# Altium PCB CapElectrodes_v2.0.PcbDoc
Units mm, origin at the board's own origin, x right, y up, seen from the top; angles counter-clockwise.
Board outline 44 x 44 mm, 4 copper layers (Top Layer 1, GND, PWR, Bottom Layer 1), stack 0.603 mm thick; 50 components, 31 nets, 132 pads, 53 vias.
Unrouted connection lines stored in the file: 8.
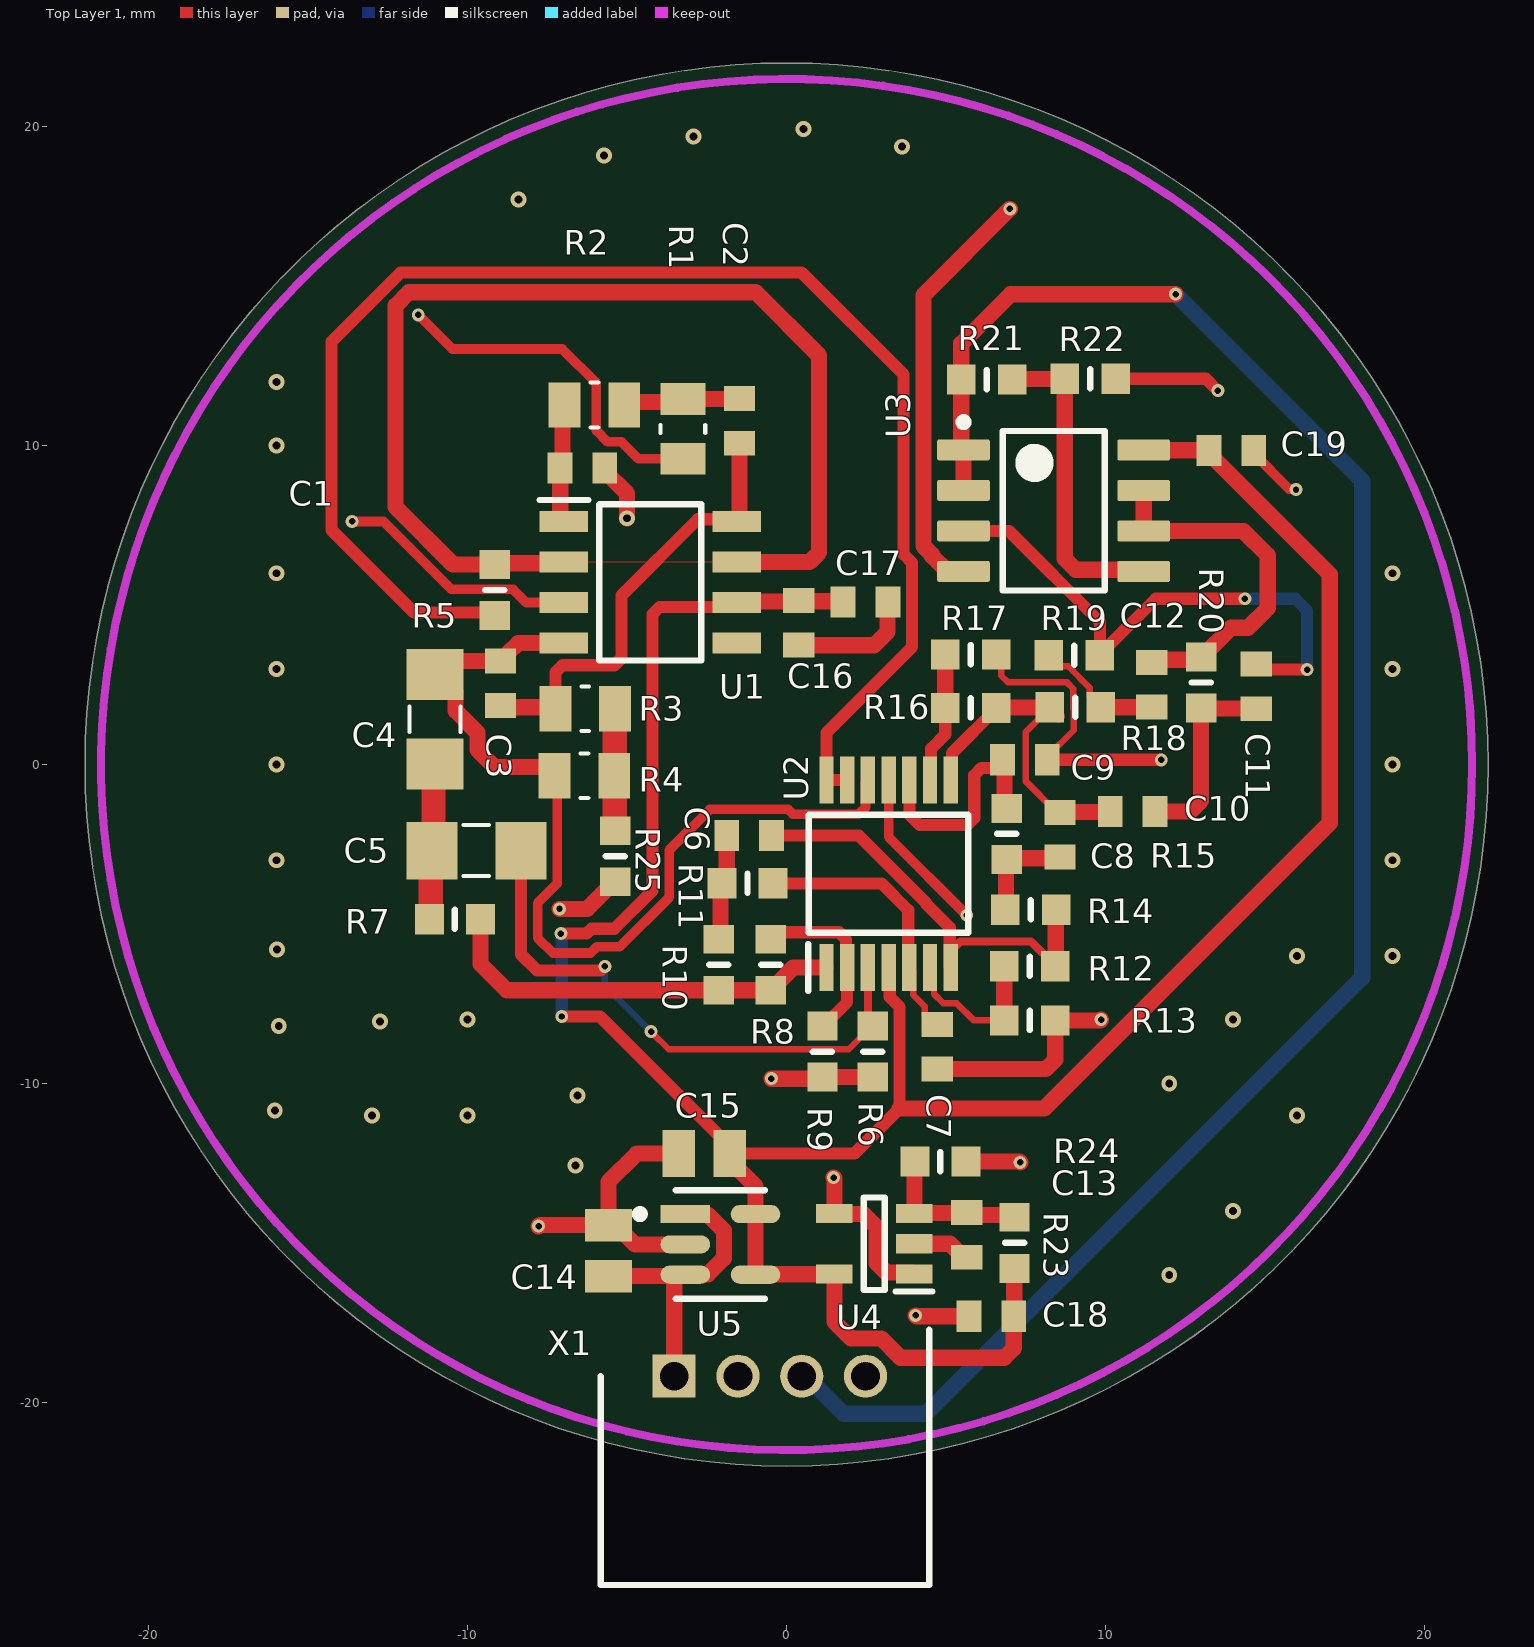
[diagram p0: Top Layer 1 view]
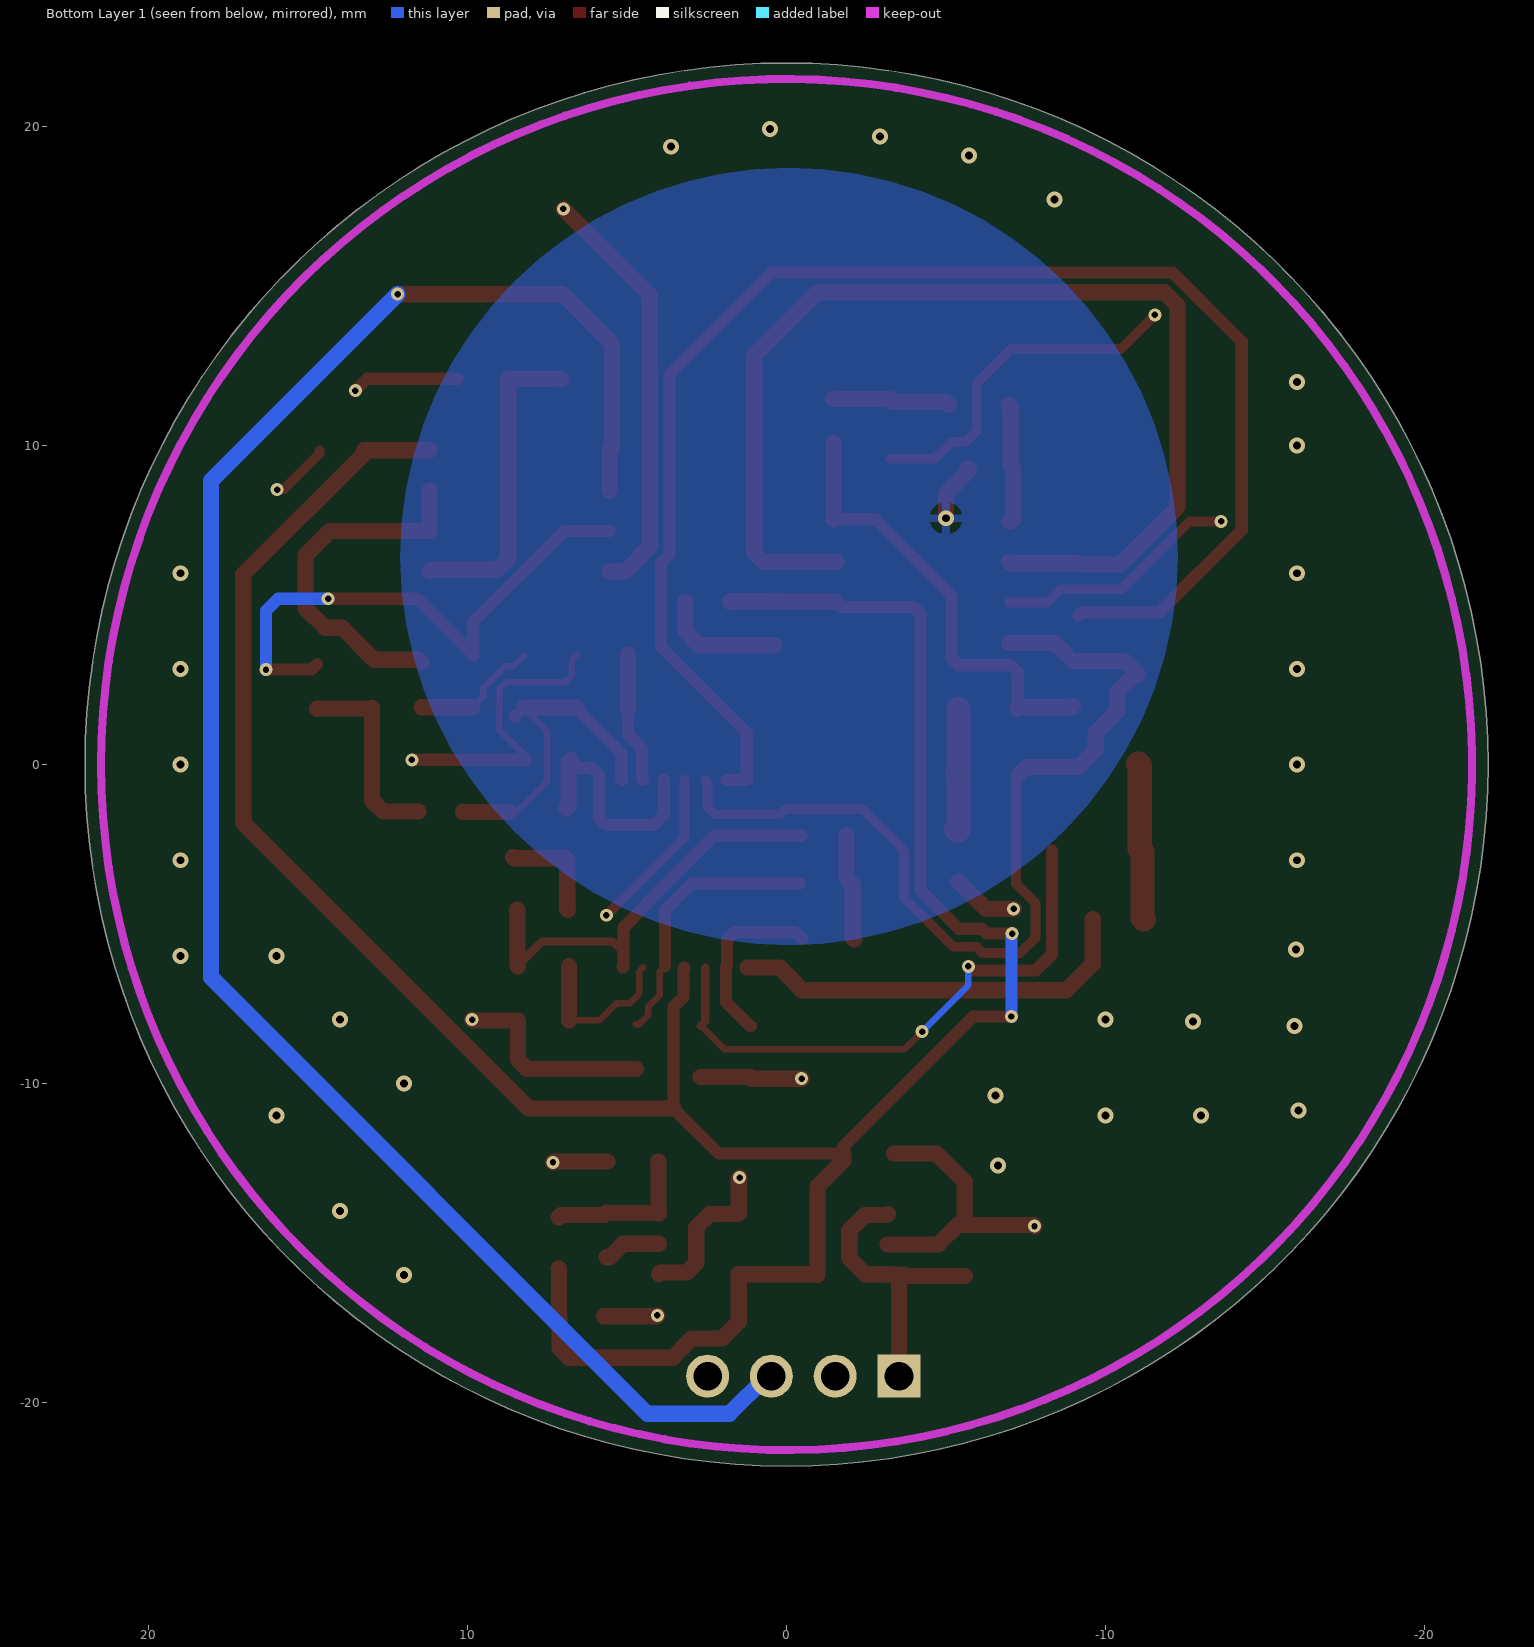
[diagram p1: Bottom Layer 1 view, seen from below]
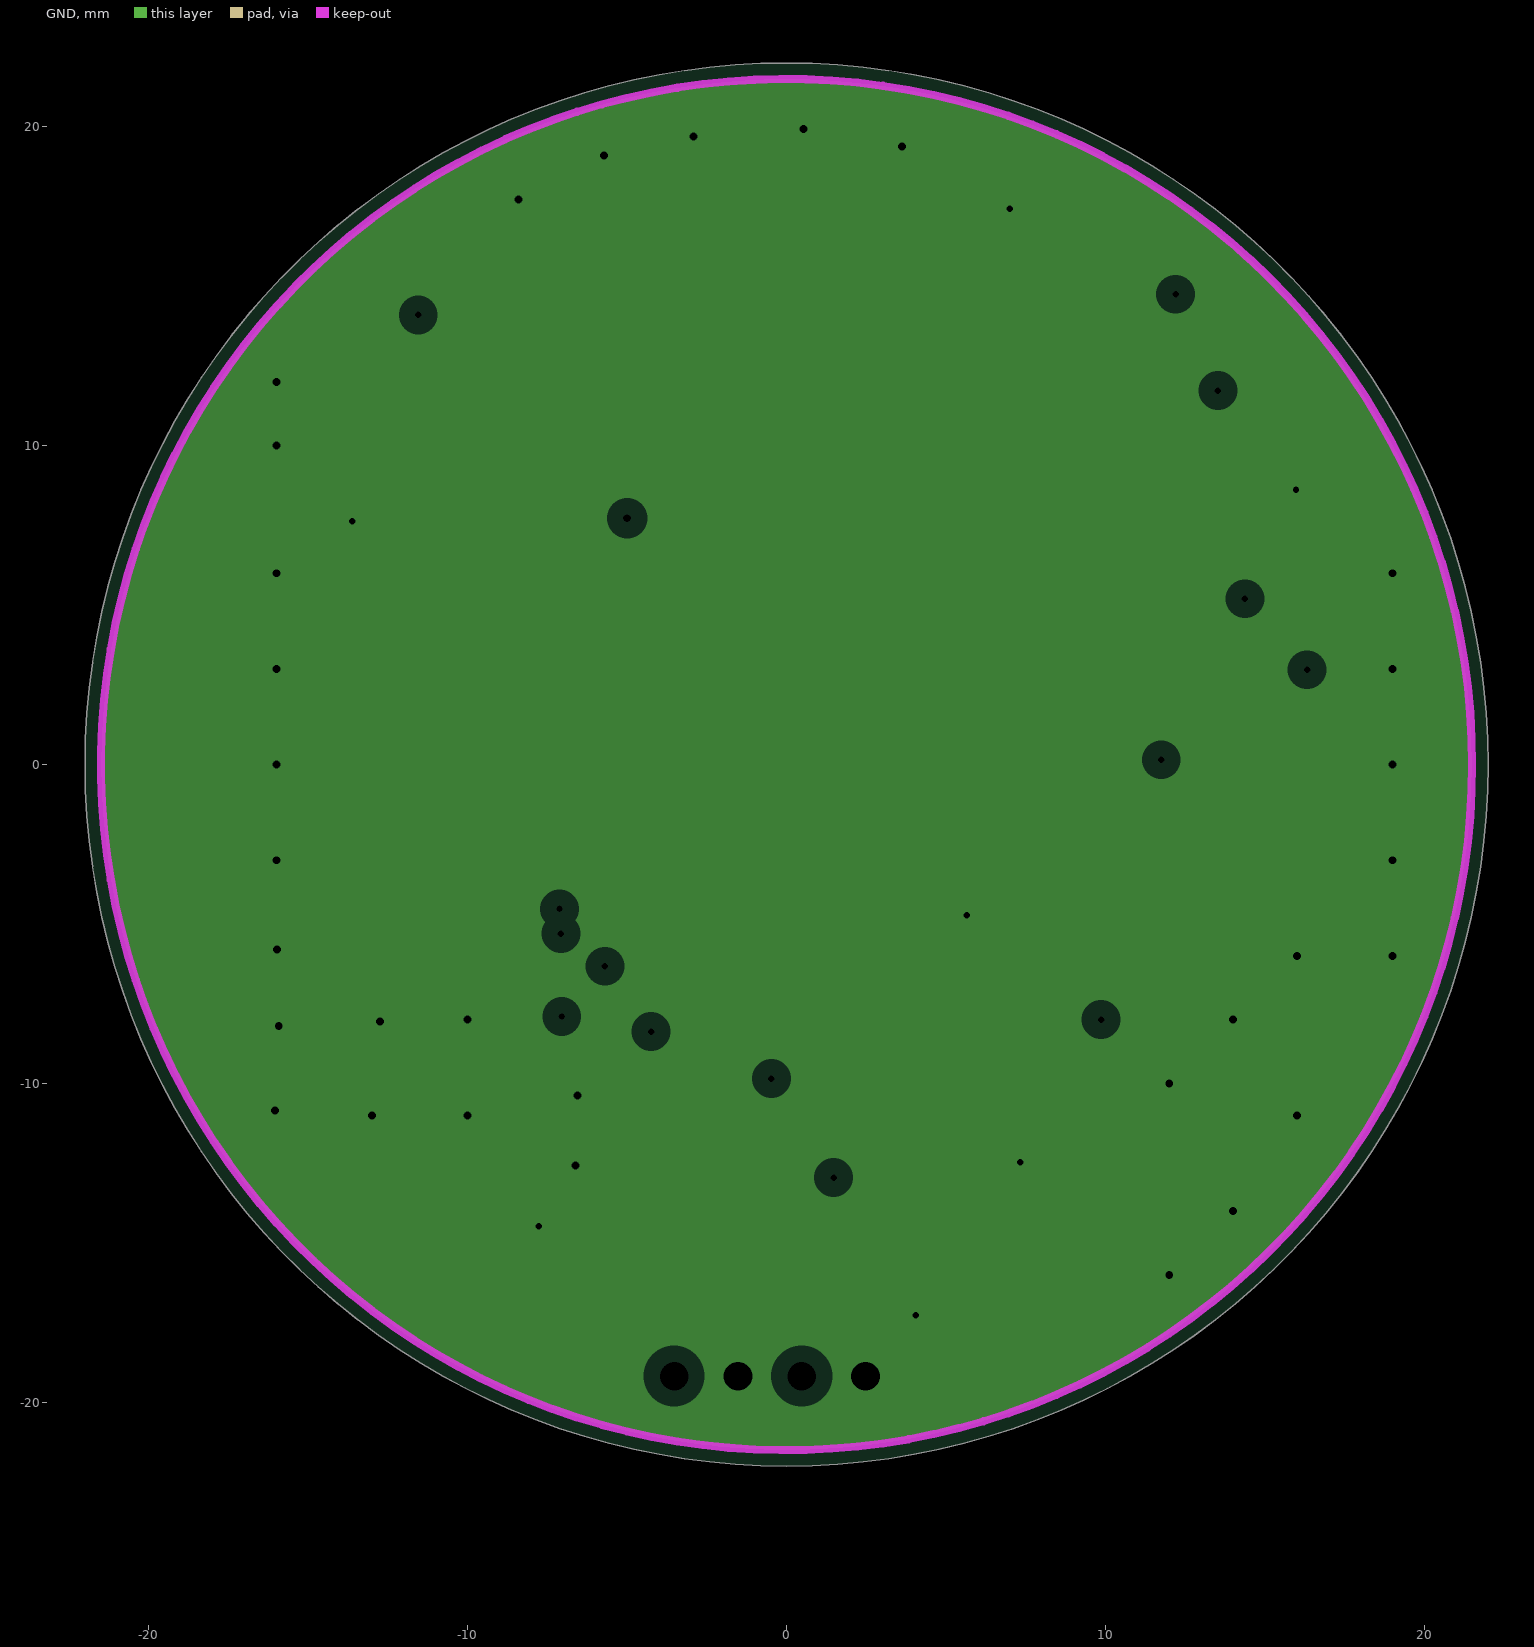
[diagram p2: GND, clearances drawn from the general rule]
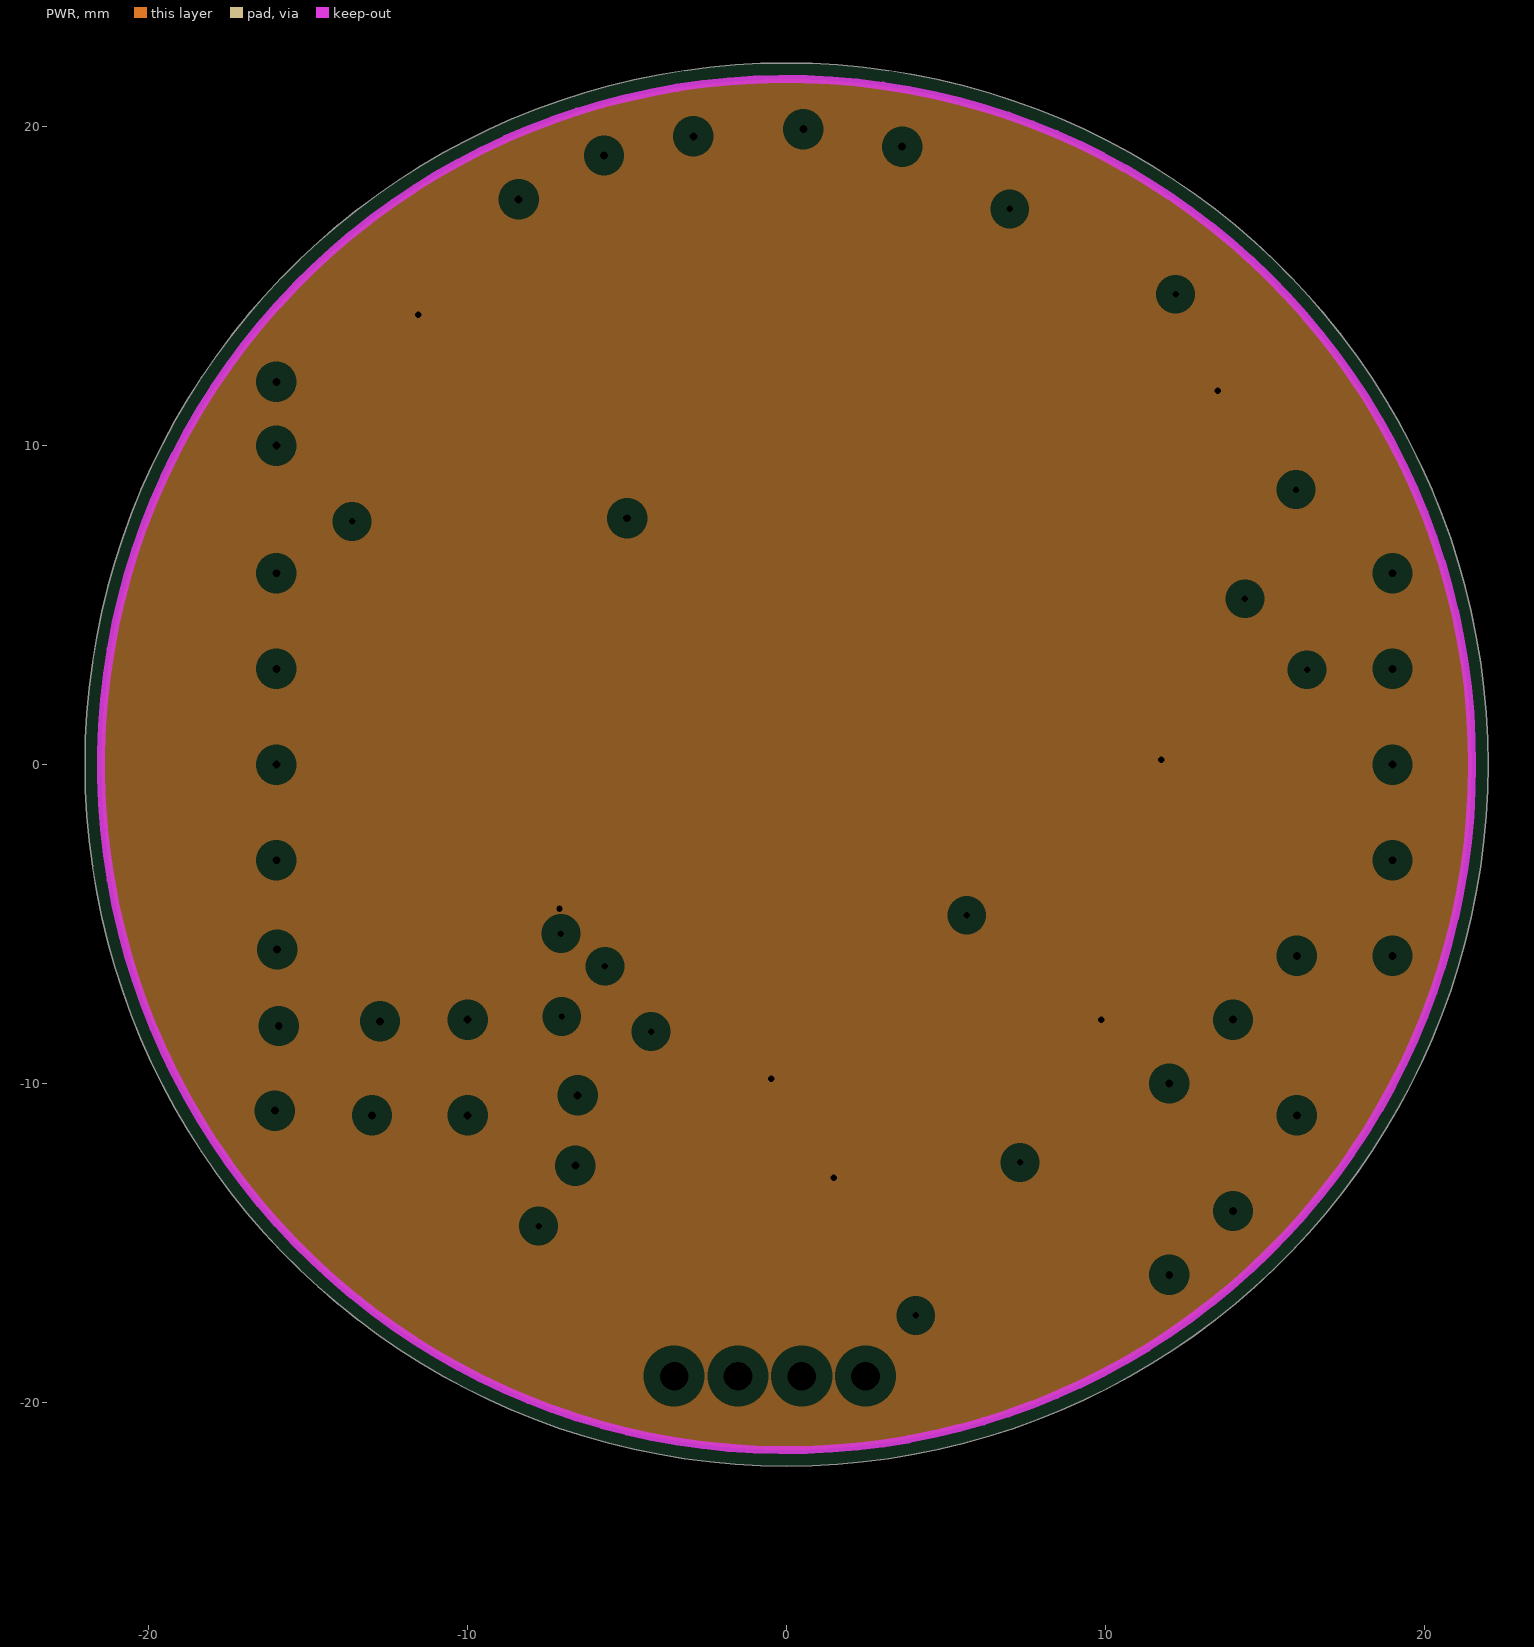
[diagram p3: PWR, clearances drawn from the general rule]
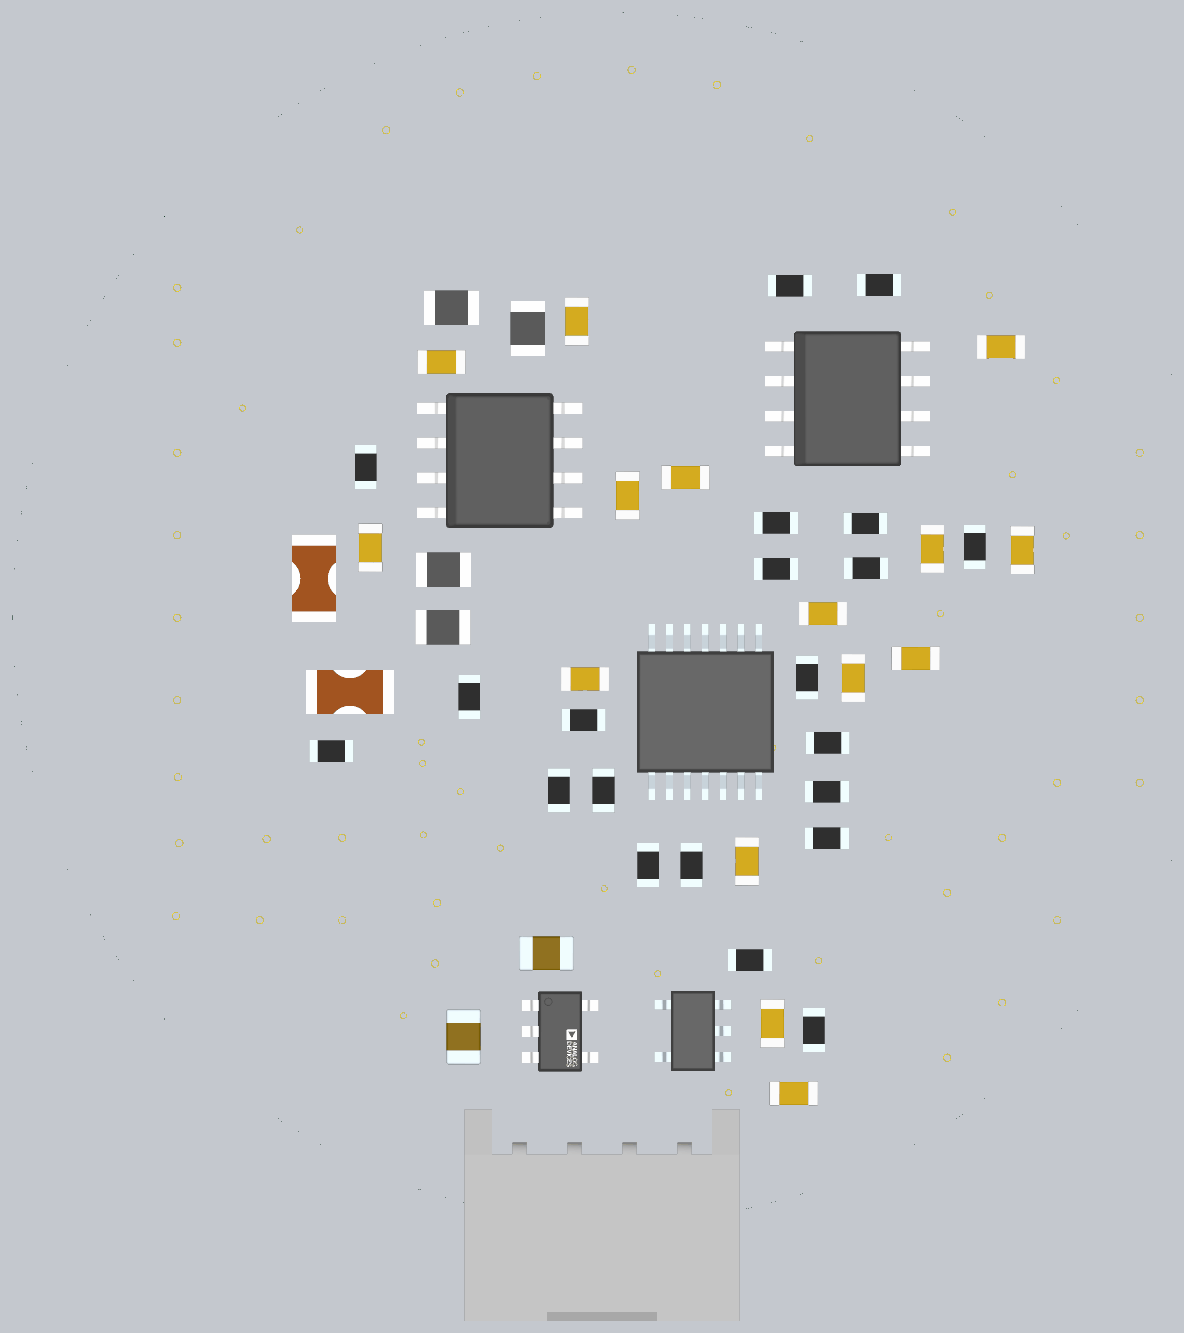
[diagram p4: 3D render of the assembled board from above, using the file's embedded part models]

## Layer stack, top to bottom
Top Solder: solder mask 0.0102, Solder Resist, Dk 3.5
Top Layer 1: signal copper 0.0356
Dielectric 2: prepreg 0.0711, PP-006, Dk 4.1
GND: plane copper 0.035, net GND
Dielectric 1: dielectric 0.32, FR-4, Dk 4.8
PWR: plane copper 0.035, net +2.5V
Dielectric 3: prepreg 0.0711, PP-006, Dk 4.1
Bottom Layer 1: signal copper 0.0356
Bottom Solder: solder mask 0.0102, Solder Resist, Dk 3.5

## Board outline
-22,0 ccw(c0,0) 0,-22 ccw(c0,0) 22,0 ccw(c0,0) 0,22 ccw(c0,0)

## Design rules (kind name [scope] priority, off if disabled: settings)
Clearance [All] p1: gap=0.254 ignorepadtopadclearanceinfootprint=FALSE except(0: Arc-Hole Track-Hole SMDPad-Hole THPad-Hole Via-Hole Fill-Hole Poly-Hole Region-Hole Text-Hole; 0.127: SMDPad-SMDPad; 0.178: Arc-Arc Arc-Track Arc-SMDPad Track-Track Track-SMDPad)
PlaneClearance [All] p1: clearance=0.508
PlaneConnect [All] p1: planeconnectstyle=Relief reliefexpansion=0.508 reliefentries=4 reliefconductorwidth=0.254 reliefairgap=0.254
PolygonConnect [All] p1: connectstyle=Relief reliefconductorwidth=0.254 reliefentries=4 polygonreliefangle="90 Angle" airgapwidth=0.254
RoutingVias [All] p1: holewidth=0.203 width=0.406 viastyle="Through Hole" minholewidth=0.203 minwidth=0.406 maxholewidth=0.711 maxwidth=1.27
SolderMaskExpansion [All] p1: expansion=0.102 istentingtop=FALSE
Width [All] p1: maxlimit=1.524 minlimit=0.203 preferedwidth=0.254 minimp=50.000000 maximp=50.000000 favimp=50.000000
28 further rules are at their usual default settings.

## Components (designator, comment, footprint, x,y, rotation, side; value= is the part's Value field where it differs from the comment)
C1 "10n" CAP_0603 -6.4,9.3 r180 top
C2 "10n" CAP_0603 -1.475,10.775 r270 top
C3 "10n" CAP_0603 -8.975,2.55 r90 top value=100u
C4 "100n" CAPC3216X190 -11.025,1.425 r270 top value=100pF
C5 "100n" CAPC3216X190 -9.725,-2.7 r0 top value=100pF
C6 "10n" CAP_0603 -1.175,-2.225 r180 top value=100pF
C7 "10n" CAP_0603 4.725,-8.85 r90 top value=100pF
C8 "10n" CAP_0603 8.575,-2.2 r270 top value=100pF
C9 "10n" CAP_0603 7.475,0.15 r180 top value=100pF
C10 "10n" CAP_0603 10.85,-1.475 r180 top value=100pF
C11 "10n" CAP_0603 14.725,2.45 r270 top value=100pF
C12 "10n" CAP_0603 11.45,2.5 r270 top value=100pF
C13 "100n" CAP_0603 5.65,-14.75 r90 top
C14 "2.2u" CAP_0805 -5.588,-15.24 r90 top value=100pF
C15 "2.2u" CAP_0805 -2.575,-12.2 r180 top value=100pF
C16 "100n" CAP_0603 0.381,4.445 r90 top value=100pF
C17 "100n" CAP_0603 2.475,5.1 r180 top
C18 "100n" CAP_0603 6.425,-17.3 r0 top value=100pF
C19 "100n" CAP_0603 13.95,9.85 r180 top value=100pF
R1 "1G" RESC2012X60N -3.25,10.525 r90 top value=10GΩ
R2 "1G" RESC2012X60N -6.025,11.275 r180 top value=10GΩ
R3 "1G" RESC2012X60N -6.315,1.75 r0 top value=10GΩ
R4 "1G" RESC2012X60N -6.34,-0.35 r180 top value=10GΩ
R5 "100" RES_0603 -9.15,5.475 r270 top value=1K
R6 "1.4M" RES_0603 2.7,-9 r90 top value=1K
R7 "9.31M" RES_0603 -10.4,-4.85 r0 top value=1K
R8 "9.53k" RES_0603 -0.5,-6.275 r90 top value=1K
R9 "1k" RES_0603 1.125,-9 r90 top value=1K
R10 "42.2k" RES_0603 -2.125,-6.275 r90 top value=1K
R11 "267k" RES_0603 -1.225,-3.725 r0 top value=1K
R12 "5.49k" RES_0603 7.625,-6.325 r180 top value=1K
R13 "1k" RES_0603 7.625,-8.025 r0 top value=1K
R14 "22.6k" RES_0603 7.653,-4.552 r180 top value=1K
R15 "499k" RES_0603 6.9,-2.175 r90 top value=1K
R16 "15.4k" RES_0603 5.775,1.775 r180 top value=1K
R17 "1k" RES_0603 5.775,3.45 r0 top value=1K
R18 "470k" RES_0603 9.05,1.8 r0 top value=1K
R19 "470k" RES_0603 9.025,3.425 r0 top value=1K
R20 "120k" RES_0603 13,2.575 r90 top value=1K
R21 "120k" RES_0603 6.275,12.075 r180 top value=1K
R22 "1k" RES_0603 9.525,12.1 r180 top value=1K
R23 "100k" RES_0603 7.15,-15 r90 top
R24 "100k" RES_0603 4.825,-12.45 r0 top
R25 "100" RES_0603 -5.375,-2.875 r270 top value=1K
U1 "LMP7721" SOIC127P600X175-8N -4.274,5.715 r0 top
U2 "OPA4188" SOP65P640X120-14N 3.2,-3.425 r90 top
U3 "LMV772MA/NOPB" D0008A_M 8.375,7.96 r0 top
U4 "MCP6V51" SOT95P280X145-5N 2.75,-15.025 r180 top
U5 "ADP7142AUJZ-5.0-R7" FP-UJ-5-IPC_B -2.075,-15.047 r0 top
X1 "MAIN_CONN" SHDRRA4W50P15X200_1X4_1000X770X525P -3.524,-19.177 r180 top

## Footprints (in the part's own frame and the unit in brackets; to place one, negate y for a bottom-side part, rotate by r counter-clockwise, add the part's x,y. Pads: shape width x height; smd on the part's side, far side on the other; paste and mask are expansions set on the pad)
CAP_0603 [mm]
  rect 0.78x0.98 smd: 1(-0.7,0) 2(0.7,0)
  body extent -0.88,-0.43 0.87,0.44, height 0.91
CAP_0805 [mm]
  rect 1.02x1.47 smd: 1(-0.8,0) 2(0.8,0)
  body extent -1,-0.63 1,0.63, height 0.88
CAPC3216X190 [mm]
  rect 1.6x1.8 smd: 1(-1.4,0) 2(1.4,0)
  silkscreen extent -0.4,-0.8 0.4,0.8, body extent -1.6,-0.8 1.6,0.8, height 1.5
D0008A_M [mm] "SOIC, 8-Leads, Body 5x4mm, Pitch 1.27mm, IPC Low Density"
  rrect15% 1.65x0.65 smd: 1(-2.825,1.905) 2(-2.825,0.635) 3(-2.825,-0.635) 4(-2.825,-1.905) 5(2.825,-1.905) 6(2.825,-0.635) 7(2.825,0.635) 8(2.825,1.905)
  silkscreen extent -2.95,-2.5 1.6,2.9, body extent -3,-2.45 3,2.45, height 1.63
FP-UJ-5-IPC_B [mm]
  rect 1.554x0.572 smd paste+0 mask+0: 1(-1.1,0.95)
  rrect100% 1.554x0.572 smd paste+0 mask+0: 2(-1.1,0) 3(-1.1,-0.95) 4(1.1,-0.95) 5(1.1,0.95)
  silkscreen extent -2.65,-1.7 1.4,1.7, body extent -2.13,-1.7 2.13,1.7, height 0.25
RES_0603 [mm]
  rect 0.9x0.95 smd: 1(-0.8,0) 2(0.8,0)
  silkscreen extent 0,-0.3 0,0.3, body extent -0.8,-0.4 0.8,0.4, height 0.55
RESC2012X60N [mm]
  rect 1x1.42 smd: 1(-0.935,0) 2(0.935,0)
  silkscreen extent -0.12,-0.7 0.12,0.7, body extent -1,-0.63 1,0.63, height 0.6
SHDRRA4W50P15X200_1X4_1000X770X525P [mm]
  rect 1.35x1.35 hole 0.9: 1(0,0)
  round 1.35 hole 0.9: 2(-2,0) 3(-4,0) 4(-6,0)
  silkscreen extent -8,-1.45 2.3,6.55, body extent -7.97,-1.3 2.03,6.4, height 4.95
SOIC127P600X175-8N [mm]
  rect 1.528x0.65 smd: 1(-2.711,1.905) 2(-2.711,0.635) 3(-2.711,-0.635) 4(-2.711,-1.905) 5(2.711,-1.905) 6(2.711,-0.635) 7(2.711,0.635) 8(2.711,1.905)
  silkscreen extent -3.47,-2.45 1.6,2.58, body extent -3.01,-2.45 3.01,2.45, height 1.63
SOP65P640X120-14N [mm]
  rect 1.475x0.45 smd: 1(-2.938,1.95) 2(-2.938,1.3) 3(-2.938,0.65) 4(-2.938,0) 5(-2.938,-0.65) 6(-2.938,-1.3) 7(-2.938,-1.95) 8(2.938,-1.95) 9(2.938,-1.3) 10(2.938,-0.65) 11(2.938,0) 12(2.938,0.65) 13(2.938,1.3) 14(2.938,1.95)
  silkscreen extent -3.67,-2.5 1.85,2.52, body extent -3.2,-2.5 3.2,2.5, height 1.2
SOT95P280X145-5N [mm]
  rect 1.15x0.6 smd: 1(-1.25,0.95) 2(-1.25,0) 3(-1.25,-0.95) 4(1.25,-0.95) 5(1.25,0.95)
  silkscreen extent -1.83,-1.45 0.33,1.5, body extent -1.4,-1.45 1.4,1.45, height 1.45

## Part data
C1 C2 C3: library part Cap, "C0603C103J3GACTU", LatestRevisionDate=17-Jul-2002, LatestRevisionNote="Re-released for DXP Platform.", PackageDescription="Radial Cap, Thru-Hole; 2 Leads; 0.3 in Pin Spacing", PackageReference=RAD-0.3, Published=8-Jun-2000, Publisher="Altium Limited"
C4 C5 C6 C7 C8 C9 C10 C11 C12 C14 C15: library part Cap, "Capacitor", LatestRevisionDate=17-Jul-2002, LatestRevisionNote="Re-released for DXP Platform.", PackageDescription="Radial Cap, Thru-Hole; 2 Leads; 0.3 in Pin Spacing", PackageReference=RAD-0.3, Published=8-Jun-2000, Publisher="Altium Limited"
C13: library part Cap, "MC0402B104K100CT", Manufacturer 1="Taiyo Yuden", Manufacturer Part Number 1=EMK107B7104KA-T
C16 C17 C18 C19: library part Cap, "MC0402B104K100CT", LatestRevisionDate=17-Jul-2002, LatestRevisionNote="Re-released for DXP Platform.", PackageDescription="Radial Cap, Thru-Hole; 2 Leads; 0.3 in Pin Spacing", PackageReference=RAD-0.3, Published=8-Jun-2000, Publisher="Altium Limited"
R1 R2 R3 R4: library part Res2, "HR0805F-1G0JI", LatestRevisionDate=17-Jul-2002, LatestRevisionNote="Re-released for DXP Platform.", PackageDescription="Axial Device, Thru-Hole; 2 Leads; 0.4 in Pin Spacing", PackageReference=AXIAL-0.4, Published=8-Jun-2000, Publisher="Altium Limited"
R5 R25: library part Res2, "CPF0402B100RE1", LatestRevisionDate=17-Jul-2002, LatestRevisionNote="Re-released for DXP Platform.", PackageDescription="Axial Device, Thru-Hole; 2 Leads; 0.4 in Pin Spacing", PackageReference=AXIAL-0.4, Published=8-Jun-2000, Publisher="Altium Limited"
R6 R7 R8 R9 R10 R11 R12 R13 R14 R15 R16 R17 R18 R19 R20 R21 R22: library part Res2, "Resistor", LatestRevisionDate=17-Jul-2002, LatestRevisionNote="Re-released for DXP Platform.", PackageDescription="Axial Device, Thru-Hole; 2 Leads; 0.4 in Pin Spacing", PackageReference=AXIAL-0.4, Published=8-Jun-2000, Publisher="Altium Limited"
R23: library part Res2, "MCS04020C1003FE000", Manufacturer 1=Bourns, Manufacturer Part Number 1=CR0603-FX-1203ELF
R24: library part Res2, "MCS04020C1003FE000", Manufacturer 1=Panasonic, Manufacturer Part Number 1=ERJ-3EKF1003V
U1: "LMP7721 3-Femtoampere Input Bias Current Precision Amplifier"
U2: library part AD713AQ, "Quad Channel Operational Amplifier, 4 MHz BW, 20 V/us SR, Industrial, 14-pin DIP (Q-14), Tube", Amplifiers Per Package=4, Generic Part Number=AD713, Input Bias Current=40pA, Input Offset Voltage=300uV, Manufacturer="Analog Devices", Supplier Part Number 1=AD713AQ-ND, ComponentLink1Description="Manufacturer URL", ComponentLink1URL=http://www.analog.com/en/index.html, ComponentLink2Description=Datasheet, ComponentLink2URL=http://www.analog.com/static/imported-files/data_sheets/AD713.pdf, ComponentLink3Description="Package Specification", ComponentLink3URL=http://www.analog.com/static/imported-files/packages/393665681442905251546090Q_14.pdf, DatasheetVersion="Rev. F", Iq/Amp=3mA, Mounting Technology="Through Hole", PackageDescription="14-Pin Ceramic Dual In-Line Package, Row spacing 7.62 mm, Pitch 2.54 mm", PackageReference=Q-14, Packing=Tube, PartNumber=AD713AQ, Slew Rate=20V/us, Small Signal Bandwidth=4MHz, Supplier 1=Digi-Key, Supplier 2=Farnell, Supplier 3=Newark, Supplier Part Number 2=1646254, Supplier Part Number 3=66F5831, V Span Max=36V, V Span Min=9V
U3: library part CMP-0055-00492-4, "Dual, Low Offset, Low Noise, RRO Operational Amplifier, 8-pin Narrow SOIC, Pb-Free, 95 Rail", Manufacturer="Texas Instruments", Package Reference=D0008A, PackageTopMarking=NSZXTT*LMV7*72MA, PowerWise=N, Code_IPC=SOIC127P600-8, Code_JEDEC=MS-012-AA, ComponentLink1Description="Datasheet URL", ComponentLink1URL=http://www.ti.com/general/docs/lit/getliterature.tsp?genericPartNumber=LMV772&fileType=pdf, CompType=Amplifiers, High-Reliability=Y, PackageDescription="SOIC Narrow, 4.9 x 3.9 x 1.45mm, 8 Lead, 1.27mm Pitch", PartNumber=LMV772MA/NOPB, PinCount=8, RoHS=Y
U4: library part OPA336NJ/250, "MCP6V51T-E/OT", Manufacturer 1="Texas Instruments", Manufacturer Part Number 1=OPA1671IDBVR
U5: library part CMP-09138-000124-1, "IC REG LINEAR 5V 200MA TSOT23-5", Case/Package=SOT-23-5, Dropout Voltage=200mV, Input Bias Current=1uA, Max Input Voltage=40V, Max Operating Temperature=125°C, Max Output Current=200mA, Min Current Limit=250mA, Min Input Voltage=2.7V, Min Operating Temperature=-40°C, Operating Supply Current=180uA, Output Voltage=5V, Package Quantity=3000, Power Supply Rejection Ratio (PSRR)=88dB, Quiescent Current=50uA, Accuracy=0.8%, Contact Plating=Gold, Lead Free="Contains Lead", Mount="Surface Mount", Number of Outputs=1, Number of Pins=5, Number of Regulators=1, Output Current=200mA, Output Type=Fixed, Packaging="Tape and Reel", Polarity=Positive, RoHS Compliant=Yes
X1: library part 440055-4, "Connector", Manufacturer_Name="TE Connectivity", Mouser2 Part Number=571-440055-4, Datasheet Link=https://componentsearchengine.com//440055-4.pdf, Height=5.25mm, Manufacturer_Part_Number=440055-4, Mouser2 Price/Stock=https://www.mouser.com/Search/Refine.aspx?Keyword=571-440055-4

## Via types
v1: diameter 0.5, hole 0.25, Top Layer 1 to Bottom Layer 1, 32 vias
v2: diameter 0.406, hole 0.203, Top Layer 1 to Bottom Layer 1, 21 vias

## Nets (pads, with @x,y where several pads share a name; then routed paths per layer and width w, separated by ;. In a path a pad name is that pad's centre, name@x,y a point inside that pad or via, vN(x,y) a via of type N, cw(c..) or ccw(c..) an arc to the next point about the centre after c; other vN are vias at no path point)
+2.5V: C7.1 C9.1 R1.1 R6.1 R9.1 R13.2 R17.2 R22.1 R25.2 U4.1 U4.4 | length 40.6
  Top Layer 1 w0.203: R17.2 6.736,3.289 6.736,2.789 6.95,2.575 8.795,2.575 8.994,2.376 8.994,1.733 9.004,1.723 9.004,1.079 8.175,0.25 C9.1
  Top Layer 1 w0.305: v2(-11.55,14.1) -10.48,13.03 -7.038,13.03 -5.968,11.96 -5.968,10.476 -5.612,10.12 -5.173,10.12 -4.643,9.59 R1.1
  Top Layer 1 w0.381: C9.1 v2(11.75,0.15) ; R22.1 13.15,12.1 v2(13.525,11.725)
  Top Layer 1 w0.508: v2(-7.121,-4.525) -6.25,-4.525 -5.4,-3.675 R25.2 ; v2(-0.475,-9.85) 1.075,-9.85 R9.1 R6.1 ; v2(1.475,-12.95) 1.5,-12.975 U4.4 1.523,-14.098 2.414,-14.098 2.83,-14.514 2.83,-15.631 3.127,-15.929 3.954,-15.929 U4.1 ; C7.1 8.127,-9.55 8.425,-9.252 R13.2 9.838,-8.025 v2(9.864,-8)
+5V: C15.1 C16.2 C17.2 C18.2 C19.2 R23.1 U1.6 U2.4 U3.8 U4.5 U5.4 U5.5 | length 87.9
  Top Layer 1 w0.381: v2(-7.075,-5.3) -6.273,-5.3 -6.121,-5.147 -5.401,-5.147 -4.2,-3.946 -4.2,4.722 -3.977,4.945 -1.697,4.945 U1.6 ; v2(-7.05,-7.9) -5.85,-7.9 -1.775,-11.975 C15.1 2.129,-12.2 3.543,-10.786 3.543,-7.597 3.235,-7.289 3.235,-6.398 U2.4
  Top Layer 1 w0.508: C15.1 -1.775,-12.425 -0.974,-13.226 U5.5 U5.4 -0.963,-15.986 1.489,-15.986 U4.5 1.5,-17.475 2.019,-17.994 2.966,-17.994 3.572,-18.6 6.827,-18.6 7.125,-18.302 C18.2 7.138,-17.288 7.138,-15.813 R23.1 ; U1.6 -1.53,5.112 0.348,5.112 C16.2 0.404,5.122 1.752,5.122 C17.2 ; 3.543,-10.786 8.083,-10.786 17.036,-1.833 17.036,5.964 13.25,9.75 C19.2 13.243,9.857 11.208,9.857 U3.8
  Bottom Layer 1 w0.381: v2(-7.075,-5.3) -7.075,-5.307 -7.05,-5.332 v2(-7.05,-7.9)
ELEC_IN: C1.1 | length 1.9
  Top Layer 1 w0.508: C1.1 -5.7,9.2 -5,8.5 v1(-5,7.725)
G_IN: R5.1 U1.2 U1.7 | length 35.5
  Top Layer 1 w0.508: U1.2 -7.023,6.312 -9.113,6.312 R5.1 -10.462,6.275 -12.261,8.075 -12.261,14.395 -11.845,14.811 -0.968,14.811 1.016,12.827 1.016,6.648 0.718,6.35 U1.7
GND: C13.1 C14.2 C15.2 C16.1 C17.1 C18.1 C19.1 R24.2 U1.3 U2.11 U3.4 U4.2 U5.2 X1.2 X1.4 | length 46.1
  Top Layer 1 w0.305: v2(-13.625,7.625) -12.638,7.625 -10.508,5.495 -8.578,5.495 -8.345,5.262 -8.345,5.259 -8.166,5.08 U1.3 ; U2.11 3.2,-2.275 v2(5.65,-4.725) ; C19.1 14.65,9.75 15.756,8.644 15.956,8.644 v2(15.975,8.625)
  Top Layer 1 w0.508: v2(-7.775,-14.475) -7.74,-14.44 C14.2 ; C15.2 -4.7,-12.2 -5.588,-13.088 C14.2 ; U5.2 -4.756,-15.047 -5.363,-14.44 C14.2 ; C16.1 2.745,3.745 3.167,4.167 3.167,5.092 C17.1 ; U4.2 5.125,-15.025 5.55,-15.45 C13.1 ; v2(4.05,-17.275) 4.075,-17.3 C18.1 ; U3.4 5.05,6.055 4.556,6.549 4.556,6.587 4.293,6.85 4.293,14.718 v2(7,17.425) ; R24.2 7.3,-12.45 v2(7.325,-12.475)
  other v1: 12,-16 14,-14 -6.625,-12.575 -13,-11 -10,-11 16,-11 -16.05,-10.85 -6.55,-10.375 12,-10 -15.925,-8.2 -12.75,-8.05 -10,-8 14,-8 16,-6 19,-6 -15.975,-5.8 -16,-3 19,-3 -16,0 19,0 -16,3 19,3 -16,6 19,6 -16,10 -16,12 -8.4,17.725 -5.725,19.1 3.625,19.375 -2.925,19.7 0.525,19.925
HPF_OUT: R7.2 R8.1 R10.1 U2.1 | length 12.9
  Top Layer 1 w0.508: R7.2 -9.6,-6.25 -8.775,-7.075 R10.1 R8.1 -0.475,-7.075 -0.279,-6.879 -0.279,-6.854 0.212,-6.363 U2.1@1.221,-6.363
LPF_OUT: C8.1 C10.2 R16.1 R18.1 U2.8 | length 10.1
  Top Layer 1 w0.203: R18.1@8.25,1.775 7.506,1.031 7.506,-0.531 8.475,-1.5 C8.1
  Top Layer 1 w0.381: U2.8 5.185,-0.452 5.185,0.36 6.575,1.75 R16.1 ; R18.1@8.25,1.775 R18.1 ; R18.1@8.51,1.515 R18.1@8.534,1.515
  Top Layer 1 w0.508: R16.1 6.588,1.787 R18.1@8.237,1.787 ; C8.1@8.687,-1.488 10.138,-1.488 C10.2
NetC1_2: C1.2 R2.2 U1.1 | length 3.8
  Top Layer 1 w0.508: U1.1 -7.029,7.62 -7.1,7.691 C1.2 -7.03,9.37 -7.03,11.205 R2.2
NetC2_1: C2.1 R1.2 R2.1 | length 3.7
  Top Layer 1 w0.508: R2.1 -4.998,11.367 -3.343,11.367 R1.2 -3.243,11.468 -1.483,11.468 C2.1
NetC2_2: C2.2 C3.1 R3.1 U1.8 | length 14.2
  Top Layer 1 w0.381: R3.1 -7.25,2.894 -7.027,3.117 -5.398,3.117 -5.175,3.34 -5.175,5.3 -2.784,7.691 U1.8@-1.475,7.691
  Top Layer 1 w0.508: C3.1 -8.925,1.8 -7.3,1.8 R3.1 ; U1.8@-1.475,7.691 C2.2
NetC4_2: C4.2 C5.1 R7.1 | length 4.9
  Top Layer 1 w0.762: R7.1 -11.162,-4.812 -11.162,-2.738 C5.1 -11.075,-2.65 -11.075,-0.025 C4.2
NetC5_2: C5.2 R6.2 U2.3 | length 18.2
  Top Layer 1 w0.203: v2(-4.25,-8.375) -3.696,-8.929 1.946,-8.929 2.675,-8.2 R6.2
  Top Layer 1 w0.254: U2.3 2.55,-8.05 R6.2
  Top Layer 1 w0.381: C5.2 -8.325,-5.953 -7.825,-6.453 -5.828,-6.453 v2(-5.7,-6.325)
  Bottom Layer 1 w0.203: v2(-5.7,-6.325) -5.7,-6.925 v2(-4.25,-8.375)
NetC6_1: C6.1 R12.1 R14.1 U2.7 | length 13.6
  Top Layer 1 w0.254: U2.7@5.15,-5.85 5.455,-5.545 7.67,-5.545 8.425,-6.3 R12.1
  Top Layer 1 w0.381: C6.1 2.265,-2.225 4.374,-4.334 4.374,-4.365 5.116,-5.106 5.116,-6.328 U2.7
  Top Layer 1 w0.508: R12.1 8.439,-6.311 8.439,-4.566 R14.1
NetC6_2: C6.2 R10.2 R11.1 | length 3.4
  Top Layer 1 w0.508: R10.2 -2.075,-5.425 -2.075,-3.775 -1.875,-3.575 C6.2
NetC7_2: C7.2 R11.2 U2.5 | length 8.6
  Top Layer 1 w0.203: U2.5@3.816,-6.328 3.973,-6.486 3.973,-7.223 4.337,-7.587 4.337,-7.862 4.625,-8.15 C7.2
  Top Layer 1 w0.381: R11.2 2.975,-3.725 3.816,-4.566 U2.5@3.816,-6.328
NetC8_2: C8.2 R14.2 R15.1 | length 3.3
  Top Layer 1 w0.508: R14.2 6.877,-4.529 6.877,-2.998 R15.1 6.937,-2.937 8.538,-2.937 C8.2
NetC9_2: C9.2 R15.2 U2.10 | length 7.4
  Top Layer 1 w0.381: U2.10 3.85,-1.575 4.175,-1.9 5.661,-1.9 5.884,-1.677 5.884,-0.332 6.107,-0.109 6.575,-0.109 6.775,0.091 C9.2
  Top Layer 1 w0.508: C9.2 6.837,0.088 6.837,-1.312 R15.2
NetC10_1: C10.1 C11.2 R20.1 | length 6.2
  Top Layer 1 w0.508: C10.1 12.65,-1.475 13,-1.125 R20.1 13.013,1.762 14.713,1.762 C11.2
NetC11_1: C11.1 R19.2 U3.3 | length 17.4
  Top Layer 1 w0.381: U3.3 6.975,7.325 9.825,4.475 R19.2@9.825,3.45 ; R19.2 R19.2@9.825,3.45 ; v2(14.375,5.2) 11.575,5.2 R19.2@9.825,3.45 ; C11.1 14.895,2.98 16.32,2.98 v2(16.325,2.975)
  Bottom Layer 1 w0.381: v2(14.375,5.2) 15.95,5.2 16.325,4.825 v2(16.325,2.975)
NetC12_1: C12.1 R20.2 U3.6 U3.7 | length 11.5
  Top Layer 1 w0.508: U3.7 U3.6 14.325,7.325 15.086,6.564 15.086,4.905 14.47,4.289 13.939,4.289 13.025,3.375 R20.2 12.912,3.288 11.538,3.288 C12.1
NetC12_2: C12.2 R18.2 R19.1 | length 4
  Top Layer 1 w0.203: R19.1 8.57,3.08 8.829,3.08 9.505,2.404 9.505,2.145 R18.2
  Top Layer 1 w0.508: R18.2 C12.2
NetC13_2: C13.2 R23.2 R24.1 U4.3 | length 4.8
  Top Layer 1 w0.508: U4.3 U4.3@4.012,-14.062 ; R24.1 4.012,-12.462 U4.3@4.012,-14.062 ; R23.2 7.075,-14.125 5.725,-14.125 C13.2 5.637,-14.062 U4.3@4.012,-14.062
NetR3_2: R3.2 R4.1 R25.1 | length 4
  Top Layer 1 w0.762: R3.2 -5.393,1.737 R4.1@-5.393,-0.337 ; R4.1@-5.355,-0.3 R4.1@-5.393,-0.337 ; R25.1@-5.325,-2.025 R25.1 -5.39,-2.06 -5.39,-0.365 R4.1 R4.1@-5.393,-0.337
NetR5_2: R5.2 U2.13 U2.14 | length 46.9
  Top Layer 1 w0.381: R5.2 -9.241,4.766 -11.682,4.766 -14.273,7.357 -14.273,13.263 -12.102,15.433 0.467,15.433 3.671,12.229 3.671,6.592 3.933,6.33 3.933,3.683 1.25,1 U2.14 U2.13
NetR8_2: R8.2 R9.2 U2.2 | length 5.6
  Top Layer 1 w0.381: R8.2 -0.282,-5.257 1.642,-5.257 1.866,-5.48 1.866,-6.328 U2.2 1.9,-7.45 1.15,-8.2 R9.2
NetR12_2: R12.2 R13.1 U2.6 | length 5.1
  Top Layer 1 w0.203: U2.6 4.623,-6.486 4.623,-7.194 4.91,-7.481 5.331,-7.481 5.875,-8.025 R13.1
  Top Layer 1 w0.508: R13.1 R12.2
NetR16_2: R16.2 R17.1 U2.9 | length 4.1
  Top Layer 1 w0.381: U2.9 4.535,-0.452 4.535,0.5 4.975,0.94 R16.2
  Top Layer 1 w0.508: R16.2 R17.1
NetR21_1: R21.1 R22.2 U3.5 | length 9.9
  Top Layer 1 w0.508: R21.1 7.087,12.087 8.5,12.087 8.712,12.087 R22.2 8.725,6.455 9.069,6.111 11.144,6.111 U3.5
PREAMP_OUT: C3.2 C4.1 R4.2 U1.4 U2.12 | length 29.5
  Top Layer 1 w0.305: R4.2@-7.275,-0.325 R4.2 -7.195,-0.43 -7.195,-3.737 -7.804,-4.346 -7.804,-5.433 -7.328,-5.91 -6.147,-5.91 -5.953,-5.715 -5.233,-5.715 -3.679,-4.162 -3.679,-2.682 -2.402,-1.405 0.052,-1.405 0.202,-1.555 2.262,-1.555 2.477,-1.339 2.477,-0.56 U2.12
  Top Layer 1 w0.508: C3.2 -10.6,3.25 C4.1 -10.925,2.825 -10.379,2.279 -10.379,1.69 -9.693,1.004 -9.693,0.468 -9.146,-0.079 -7.521,-0.079 R4.2@-7.275,-0.325 ; C3.2@-8.739,3.486 -8.415,3.81 U1.4
SIG_OUT: R21.2 U3.1 U3.2 X1.3 | length 59.6
  Top Layer 1 w0.508: U3.2 U3.1 5.546,9.865 5.475,9.936 5.475,13.2 7.025,14.75 v2(12.2,14.75)
  Bottom Layer 1 w0.508: X1.3 0.611,-19.177 1.794,-20.36 4.365,-20.36 18.05,-6.675 18.05,8.9 v2(12.2,14.75)
VIN: C14.1 U5.1 U5.3 X1.1 | length 9.3
  Top Layer 1 w0.508: C14.1 -3.726,-16.04 -3.683,-15.997 U5.3@-3.494,-15.997 ; X1.1 -3.524,-16.027 U5.3@-3.494,-15.997 ; U5.1 -3.143,-14.129 -2.449,-14.129 -1.966,-14.612 -1.966,-15.482 -2.468,-15.985 -3.163,-15.985 U5.3 U5.3@-3.494,-15.997
pads on no net: U1.5

## Polygon pours and split planes (outlines as drawn)
ELEC_IN on Bottom Layer 1 "ELEC_IN" (solid, remove dead copper, pour order 0): -0.075,-5.965 cw(c-0.075,6.525) -12.565,6.525 cw(c-0.075,6.525) -0.075,19.015 cw(c-0.075,6.525) 12.415,6.525 cw(c-0.075,6.525)
no net on Top Layer 1 "GND" (solid, remove dead copper, pour order 1): -7.06,6.275 -10.462,6.275 -12.261,8.075 -12.261,14.395 -11.845,14.811 -0.968,14.811 1.016,12.827 0.867,12.678 0.867,6.499 0.718,6.35 -6.985,6.35 -7.023,6.312
no net on Top Solder "GND" (solid, remove dead copper): -7.06,6.275 -10.462,6.275 -12.261,8.075 -12.261,14.395 -11.845,14.811 -0.968,14.811 1.016,12.827 1.016,6.648 0.643,6.275 -7.06,6.275
+2.5V on PWR (split plane): 217 vertices, not listed, extent -21.492,-21.492 21.492,21.492
GND on GND (split plane): 217 vertices, not listed, extent -21.492,-21.492 21.492,21.492

## Keep-outs
Keep-Out Layer:
  circle w0.254: c0,0 r21.5

## Silkscreen, mask and mechanical layers (free items; w line width, h text height)
Top Solder:
  region: -9.15,6.275 -10.462,6.275 -12.261,8.075 -12.261,14.395 -11.845,14.811 -0.968,14.811 -0.968,14.662 1.016,12.678 1.016,6.648 0.643,6.275
  lines w0.254: -7.023,6.312 -9.113,6.312 -9.15,6.275 -10.462,6.275 -12.261,8.075 -12.261,14.395 -11.845,14.811 -0.968,14.811 1.016,12.827 1.016,6.648 0.718,6.35 -6.985,6.35
Board Outline:
  circle w0.1: c0,0 r22